# Altium PCB PCB.PcbDoc
Units mm, origin at the board's own origin, x right, y up, seen from the top; angles counter-clockwise.
Board outline 41 x 58.5 mm, 2 copper layers (Top Layer, Bottom Layer); 36 components, 22 nets, 142 pads, 28 vias.
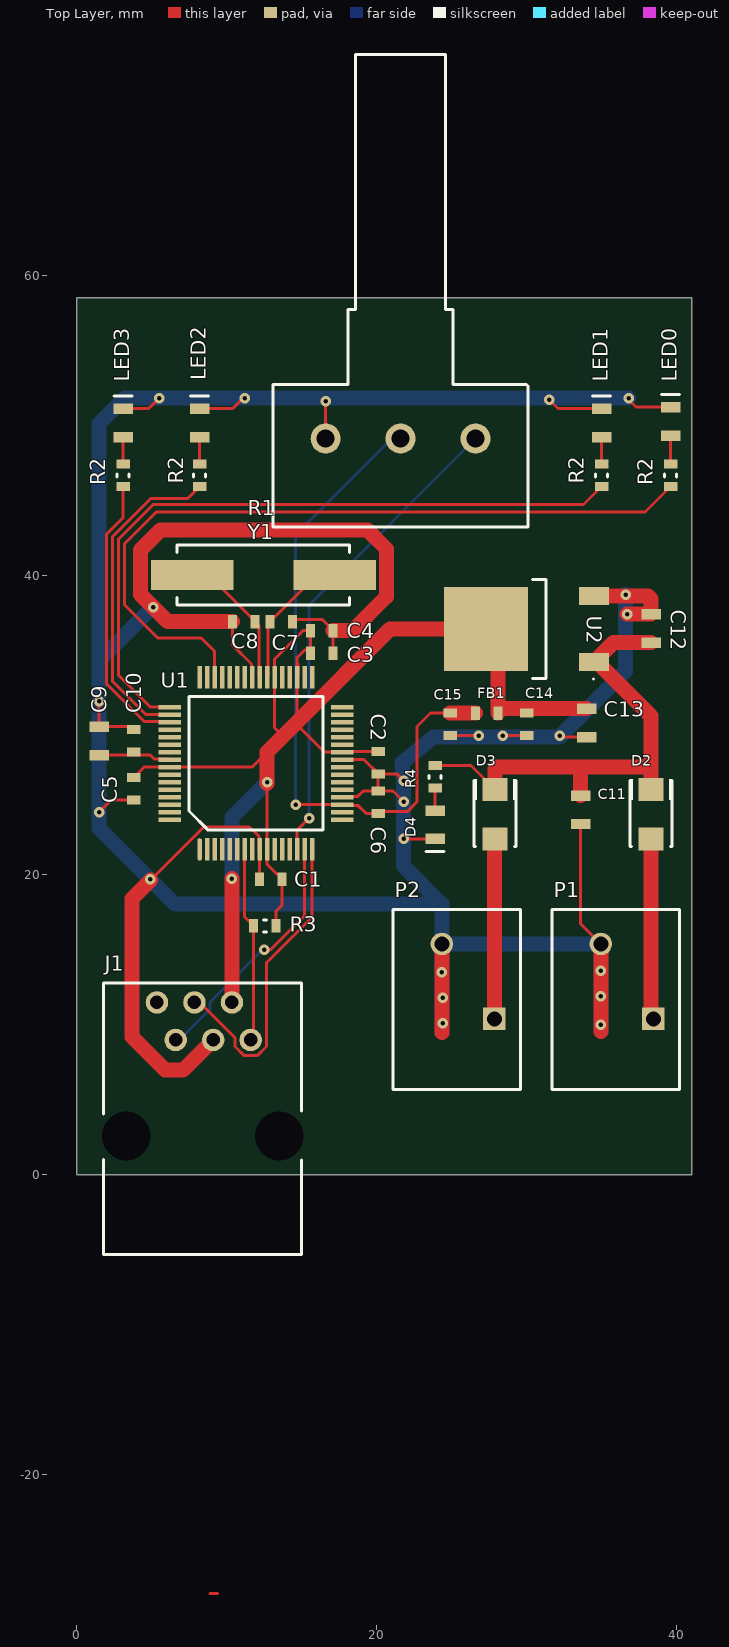
[diagram p0: Top Layer view]
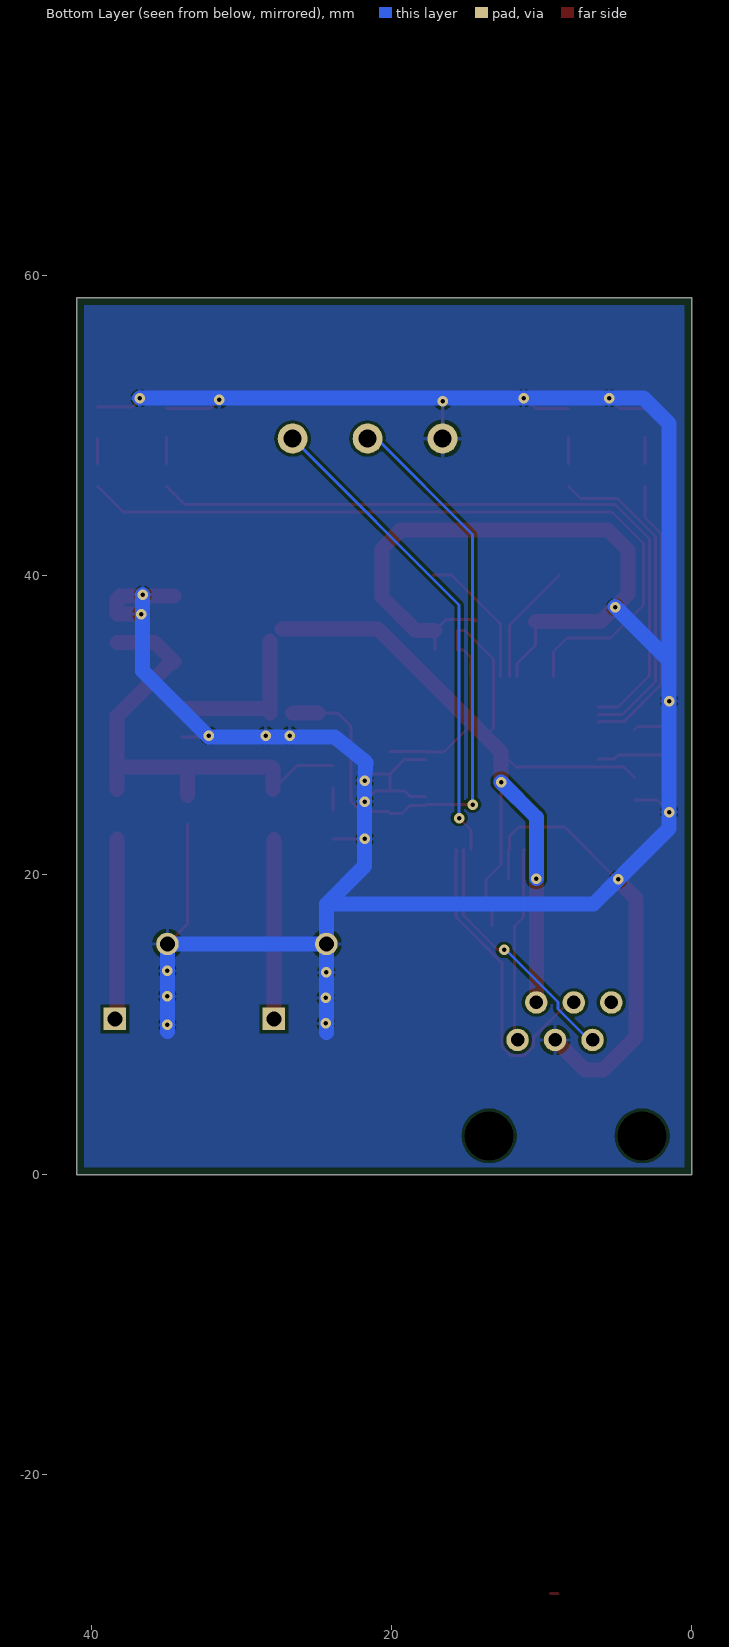
[diagram p1: Bottom Layer view, seen from below]

## Layer stack, top to bottom
Top Solder: solder mask 0.0102, Solder Resist, Dk 3.5
Top Layer: signal copper 0.0356
Dielectric 1: dielectric 0.32, FR-4, Dk 4.8
Bottom Layer: signal copper 0.0356
Bottom Solder: solder mask 0.0102, Solder Resist, Dk 3.5

## Board outline
0,0 0,58.5 41,58.5 41,0

## Design rules (kind name [scope] priority, off if disabled: settings)
Clearance [All] p1: gap=0.2
ComponentClearance [All] p1: gap=0.15 collisioncheckmode=3 verticalgap=0.15 showdistances=FALSE
HoleSize [All] p1: absolutevalues=TRUE maxlimit=5 minlimit=0.3 maxpercent=80.000 minpercent=20.000
MinimumSolderMaskSliver [All] p1: minsoldermaskwidth=0.05
PolygonConnect [All] p1: connectstyle=Relief reliefconductorwidth=0.254 reliefentries=4 polygonreliefangle="90 Angle" airgapwidth=0.254
RoutingVias [All] p1: holewidth=0.3 width=0.7 viastyle="Through Hole" minholewidth=0.3 minwidth=0.7 maxholewidth=1 maxwidth=1.2
SilkToBoardRegionClearance [Not InComponent('J1')  And  Not InComponent('R1')] p1:
SilkToSilkClearance [All] p1: silktosilkclearance=0.1
SilkToSolderMaskClearance [IsPad] p1: minsilkscreentomaskgap=0.2 clearancetoexposedcopper=TRUE
SolderMaskExpansion [All] p1: expansion=0.102
UnpouredPolygon [All] p1: allowunpoured=FALSE
Width [All] p1: maxlimit=1 minlimit=0.2 preferedwidth=0.2
23 further rules are at their usual default settings.

## Classes and differential pairs
channel class led: LED0 LED1 LED2 LED3
net class LED[0..3]: LED0 LED1 LED2 LED3
component class TP2: R1
component class POWER: C11 C12 C13 C14 C15 D2 D3 D4 FB1 P1 P2 R4 U2
component class PIC: C1 C2 C3 C4 C5 C6 C7 C8 C9 C10 J1 R3 U1 Y1
component class LED3: LED3 R2
component class LED2: LED2 R2
component class LED1: LED1 R2
component class LED0: LED0 R2

## Components (designator, comment, footprint, x,y, rotation, side; value= is the part's Value field where it differs from the comment)
C1 "100nF" CAPC1608N 12.2,19.7 r0 top
C2 "100nF" CAPC1608N 20.1,26.75 r90 top
C3 "100nF" CAPC1608N 17.1,34.8 r180 top
C4 "100nF" CAPC1608N 17.1,36.3 r180 top
C5 "100nF" CAPC1608N 3.8,25 r90 top
C6 "100nF" CAPC1608N 20.1,25.6 r270 top
C7 "20pF" CAPC1608N 14.4,36.9 r180 top
C8 "20pF" CAPC1608N 10.4,36.9 r0 top
C9 "10uF" CAPC2012N 1.5,29.9 r270 top
C10 "1uF" CAPC1608N 3.8,29.7 r270 top
C11 "10uF" CAPC2012N 33.6,23.4 r90 top
C12 "10uF" CAPC2012N 38.3,37.4 r270 top
C13 "10uF" CAPC2012N 34,29.2 r90 top
C14 "1uF" CAPC1608N 30,29.3 r90 top
C15 "100nF" CAPC1608N 24.9,29.3 r90 top
D2 "GF1A" SMA/DO-214AC_21 38.3,25.7 r270 top
D3 "GF1A" SMA/DO-214AC_21 27.9,25.7 r270 top
D4 "Green LED" "LED 0805" 23.9,22.4 r90 top
FB1 "600r" INDC1608AN 28.1,30.8 r180 top
J1 "Program / Debug" RJ12_90 1.8,-5.3 r0 top
LED0 "Green LED" "LED 0805" 39.6,51.2 r270 top (schematic designator LED3)
LED1 "Green LED" "LED 0805" 35,51.1 r270 top (schematic designator LED3)
LED2 "Green LED" "LED 0805" 8.2,51.1 r270 top (schematic designator LED3)
LED3 "Green LED" "LED 0805" 3.1,51.1 r270 top
P1 "12V Main" PHOENIX_1985195 31.7,5.7 r0 top
P2 "12V Battery" PHOENIX_1985195 21.1,5.7 r0 top
R1 "10k" PDB181-K415K-102A2 13.1,43.2 r0 top
R2 "330r" RESC1608N 3.1,45.9 r90 top
R2 "330r" RESC1608N 8.2,45.9 r90 top
R2 "330r" RESC1608N 35,45.9 r90 top
R2 "330r" RESC1608N 39.6,45.9 r90 top
R3 "4.7k" RESC1608N 13.3,16.6 r180 top
R4 "470r" RESC1608N 23.9,25.8 r90 top
U1 "PIC32MX764F128H-I/PT" QFP50P1200X1200X120-64 8.2,21.7 r90 top
U2 "AP1117" TD03B_N 27.3,36.4 r90 top
Y1 "8MHz" "HC49/4H SMX CRYSTAL" 7.7,40 r0 top

## Footprints (in the part's own frame and the unit in brackets; to place one, negate y for a bottom-side part, rotate by r counter-clockwise, add the part's x,y. Pads: shape width x height; smd on the part's side, far side on the other; paste and mask are expansions set on the pad)
CAPC1608N [mm] "0603"
  rect 0.6x0.9 smd mask+0.2: 1(0,0) 2(1.5,0)
CAPC2012N [mm] "0805"
  rect 0.7x1.3 smd mask+0.2: 1(0,0) 2(1.9,0)
"HC49/4H SMX CRYSTAL" [mm] "HC49/4HSMX"
  rect 5.5x2 smd mask+0.2: 1(0,0) 2(9.5,0)
  silkscreen extent -1,-2 10.5,2
INDC1608AN [mm] "0603"
  rect 0.6x0.9 smd mask+0.2: 1(0,0) 2(1.5,0)
"LED 0805" [mm] "0805"
  rect 0.7x1.3 smd mask+0.2: 1(1.9,0) 2(0,0)
  silkscreen extent -0.82,-0.6 -0.82,0.6
PDB181-K415K-102A2 [mm]
  round 2 hole 1.2 mask+0.2: 1(3.5,5.9) 2(8.5,5.9) 3(13.5,5.9)
  silkscreen extent 0,0 17,31.5
PHOENIX_1985195 [mm]
  rect 1.5x1.5 hole 1 mask+0.2: 1(6.75,4.7)
  round 1.5 hole 1 mask+0.2: 2(3.25,9.7)
  silkscreen extent 0,0 8.5,12
QFP50P1200X1200X120-64 [mm]
  oval 1.5x0.3 smd mask+0.2: 1(0,0)
  rect 1.5x0.3 smd mask+0.2: 2(0,-0.5) 3(0,-1) 4(0,-1.5) 5(0,-2) 6(0,-2.5) 7(0,-3) 8(0,-3.5) 9(0,-4) 10(0,-4.5) 11(0,-5) 12(0,-5.5) 13(0,-6) 14(0,-6.5) 15(0,-7) 16(0,-7.5) 33(11.5,-7.5) 34(11.5,-7) 35(11.5,-6.5) 36(11.5,-6) 37(11.5,-5.5) 38(11.5,-5) 39(11.5,-4.5) 40(11.5,-4) 41(11.5,-3.5) 42(11.5,-3) 43(11.5,-2.5) 44(11.5,-2) 45(11.5,-1.5) 46(11.5,-1) 47(11.5,-0.5) 48(11.5,0)
  rect 0.3x1.5 smd mask+0.2: 17(2,-9.5) 18(2.5,-9.5) 19(3,-9.5) 20(3.5,-9.5) 21(4,-9.5) 22(4.5,-9.5) 23(5,-9.5) 24(5.5,-9.5) 25(6,-9.5) 26(6.5,-9.5) 27(7,-9.5) 28(7.5,-9.5) 29(8,-9.5) 30(8.5,-9.5) 31(9,-9.5) 32(9.5,-9.5) 49(9.5,2) 50(9,2) 51(8.5,2) 52(8,2) 53(7.5,2) 54(7,2) 55(6.5,2) 56(6,2) 57(5.5,2) 58(5,2) 59(4.5,2) 60(4,2) 61(3.5,2) 62(3,2) 63(2.5,2) 64(2,2)
  silkscreen extent 1.28,-8.21 10.21,0.72
RESC1608N [mm] "0603"
  rect 0.6x0.9 smd mask+0.2: 1(0,0) 2(1.5,0)
  silkscreen extent 0.65,-0.4 0.85,0.4
RJ12_90 [mm]
  round 1.5 hole 0.9 mask+0.2: 1(9.8,14.3) 2(8.55,16.8) 3(7.3,14.3) 4(6.05,16.8) 5(4.8,14.3) 6(3.55,16.8)
  oval 0.75x0.7 hole 3.25 unplated mask+0.2: 13(1.5,7.9) 13(11.7,7.9)
  silkscreen extent 0,0 13.2,18.1
SMA/DO-214AC_21 [mm]
  rect 1.52x1.68 smd mask+0.2: 1(3.3,0) 2(0,0)
  silkscreen extent -0.7,-1.4 3.8,1.4
TD03B_N [mm]
  rect 1.2x2 smd mask+0.2: 1(2.2,-7.2) 3(-2.2,-7.2)
  rect 5.6x5.6 smd mask+0.2: 4(0,0)
  silkscreen extent -3.32,-7.17 3.3,-3.1

## Part data
C1 C2 C3 C4 C5 C6 C7 C8 C9 C10 C11 C12 C13 C14 C15: library part Cap, "Capacitor"
D2 D3: library part Diode, "Default Diode"
D4 LED0 LED1 LED2 LED3: library part LED2, "Typical RED, GREEN, YELLOW, AMBER GaAs LED"
FB1: library part Inductor, "Inductor"
P1 P2: library part "Header 2", "Header, 2-Pin"
R1: library part RPot, "Potentiometer"
R2 R2 R2 R2 R3 R4: library part Res1, "Resistor"
Y1: library part XTAL, "Crystal Oscillator"

## Via types
v1: diameter 0.7, hole 0.3, Top Layer to Bottom Layer, 28 vias

## Nets (pads, with @x,y where several pads share a name; then routed paths per layer and width w, separated by ;. In a path a pad name is that pad's centre, name@x,y a point inside that pad or via, vN(x,y) a via of type N, cw(c..) or ccw(c..) an arc to the next point about the centre after c; other vN are vias at no path point)
ALIM: D2.1 P1.1 | length 11.8
  Top Layer w1: P1.1@38.3,10.55 D2.1
BATTERY: D3.1 P2.1 | length 11.9
  Top Layer w1: P2.1 D3.1@27.85,22.35
GND: C1.1 C2.1 C3.1 C4.1 C5.1 C6.1 C7.1 C8.1 C9.1 C10.1 C11.1 C12.1 C13.1 C14.1 C15.1 D4.2 J1.3 LED0.2 LED1.2 LED2.2 LED3.2 P1.2 P2.2 R1.1 U1.9 U1.20 U1.25 U1.41 U2.1 | length 291.3
  Top Layer w0.2: v1(1.5,24.2) 2.3,25 C5.1 ; v1@1.5,31.7 C9.1 3.6,29.9 C10.1 ; LED3.2 4.8,51.1 v1(5.5,51.8) ; v1@4.932,19.668 8.464,23.2 11.524,23.2 12.15,22.574 12.15,21.65 U1.9 C1.1 ; LED2.2 10.4,51.1 v1@11.1,51.8 ; C8.1 10.4,35.324 11.65,34.074 U1.41@11.65,33.25 ; C7.1 14.4,37.05 16.35,37.05 C4.1 C3.1@17.1,35 ; R1.1 v1(16.6,51.6) ; U1.25 19.15,27.7 C2.1 ; U1.20@17.75,25.25 18.75,25.25 19.1,25.6 C6.1 ; v1(21.8,24.9) 21.1,25.6 C6.1 ; v1(21.8,26.3) 21.35,26.75 C2.1 ; v1@21.9,22.5 v1(21.8,22.4) D4.2 ; C15.1@24.726,29.3 C15.1 v1(26.8,29.3) ; v1(28.4,29.3) C14.1 ; v1(31.5,51.7) 32.1,51.1 LED1.2 ; v1@32.3,29.2 C13.1 ; C11.1 33.6,16.75 P1.2 ; v1@36.8,51.7 37.3,51.2 LED0.2 ; C6.1 C2.1
  Top Layer w1: v1@4.932,19.668 3.7,18.436 3.7,9.2 5.9,7 7.1,7 J1.3 ; C8.1 6.06,36.9 4.25,38.71 4.25,41.67 5.58,43 19.4,43 20.65,41.75 20.65,38.55 18.4,36.3 C4.1 ; 24.35,9.5 P2.2 ; U2.1 38.1,38.6 38.3,38.4 C12.1 v1(36.7,37.4) ; 34.95,9.55 P1.2
  Bottom Layer w1: v1@5.1,37.9 1.5,34.3 ; 24.35,9.5 P2.2 ; 34.95,9.55 P1.2 P2.2 ; v1(36.6,38.7) 36.6,33.6 32.2,29.2 23.8,29.2 21.7,27.5 v1(21.8,26.3) v1(21.8,24.9) 21.8,20.6 24.35,18.05 ; v1(36.8,51.8) v1(11.2,51.8) v1(5.5,51.8) 3.2,51.8 1.5,50.1 1.5,34.3 ; 1.5,34.3 v1(1.5,31.6) v1(1.5,24.2) 1.5,23.1 v1(4.9,19.7) 6.55,18.05 24.35,18.05 ; P2.2 24.35,18.05
  other v1: 34.95,10 24.4,10.1 24.4,11.8 34.95,11.9 24.35,13.5 34.95,13.6 32.2,29.3 5.1,37.86
LED0: R2.1@39.6,45.9 U1.46 | length 51.1
  Top Layer w0.2: U1.46 9.2,34.9 8.3,35.8 5.4,35.8 3.2,38 3.2,42.1 5.3,44.2 37.9,44.2 R2.1@39.6,45.9
LED1: R2.1@35,45.9 U1.49 | length 47
  Top Layer w0.2: U1.49 4.9,31.2 2.8,33.3 2.8,42.4 5.1,44.7 33.8,44.7 R2.1@35,45.9
LED2: R2.1@8.2,45.9 U1.50 | length 21.6
  Top Layer w0.2: U1.50 4.6,30.7 2.4,32.9 2.4,42.566 4.934,45.1 7.4,45.1 R2.1@8.2,45.9
LED3: R2.1@3.1,45.9 U1.51 | length 18.9
  Top Layer w0.2: R2.1@3.1,45.9 3.1,43.831 2,42.731 2,32.734 4.484,30.25 6.15,30.25 U1.51
MCLR: J1.1 R3.2 U1.7 | length 12.8
  Top Layer w0.2: U1.7@11.15,21.65 U1.7 11.2,17.2 R3.2 J1.1@11.8,9.2
NetC9_2: C9.2 C10.2 U1.56 | length 4.8
  Top Layer w0.2: C9.2 4.9,28 5.15,27.75 6.15,27.75 U1.56
NetD4_1: D4.1 R4.1 | length 1.5
  Top Layer w0.2: D4.1 R4.1
NetLED3_LED0_1: LED0.1 R2.2@39.6,47.4 | length 1.7
  Top Layer w0.2: R2.2@39.6,47.4 LED0.1@39.6,49.1
NetLED3_LED1_1: LED1.1 R2.2@35,47.4 | length 1.8
  Top Layer w0.2: R2.2@35,47.4 LED1.1
NetLED3_LED2_1: LED2.1 R2.2@8.2,47.4 | length 1.8
  Top Layer w0.2: R2.2@8.2,47.4 LED2.1
NetLED3_LED3_1: LED3.1 R2.2@3.1,47.4 | length 1.8
  Top Layer w0.2: R2.2@3.1,47.4 LED3.1
NetR1_3: R1.3 U1.14 | length 32.2
  Top Layer w0.2: U1.14 14.7,23 v1@15.4,23.7
  Bottom Layer w0.2: v1(15.5,23.8) 15.5,38 R1.3
PGC: J1.5 U1.15 | length 16.5
  Top Layer w0.2: v1(12.5,15) 12.9,15 15.2,17.3 U1.15
  Bottom Layer w0.2: J1.5@6.835,9 8.9,11.065 8.9,11.535 12.365,15 v1(12.5,15)
PGD: J1.4 U1.16 | length 21
  Top Layer w0.2: J1.4@8.2,11.5 10.55,9.15 10.55,8.565 11.165,7.95 12.035,7.95 12.65,8.565 12.65,14.15 15.7,17.2 U1.16 U1.16@15.65,21.65
V3P3: C1.2 C2.2 C3.2 C4.2 C5.2 C13.2 C14.2 FB1.1 J1.2 R3.1 U1.10 U1.26 U1.35 U1.38 U1.57 U2.4 | length 88.2
  Top Layer w0.2: C5.2 4.5,27.2 U1.57 11.7,27.2 12.7,28.2 ; v1@12.7,26.1 U1.10 12.7,20.7 C1.2 13.7,18 13.3,17.6 R3.1 ; 13.75,29.25 13.2,29.8 U1.38 13.2,34.4 15.1,36.3 C4.2 15.6,35 15.2,35 14.7,34.5 U1.35 14.7,30.2 ; 14.6,30.1 16.5,28.2 U1.26 ; U1.35@14.75,33.25 14.75,34.074 ; U1.26@17.75,28.25 C2.2
  Top Layer w1: J1.2 v1(10.35,19.75) ; v1@12.7,26.1 v1(12.7,26.2) 12.7,28.2 13.75,29.25 14.6,30.1 14.7,30.2 20.9,36.4 U2.4 ; FB1.1 U2.4@28.1,35.6 ; 28.4,31.1 C13.2
  Bottom Layer w1: v1(10.35,19.75) 10.35,23.85 v1(12.7,26.2)
V3P3A: C6.2 C15.2 FB1.2 R1.2 U1.19 | length 44.9
  Top Layer w0.2: v1(14.6,24.7) U1.19 ; U1.19@17.75,24.65 18.75,24.65 19.3,24.1 C6.2 20.25,24.25 22.069,24.25 22.7,24.881 22.7,29.9 23.6,30.8 C15.2
  Top Layer w1: C15.2 FB1.2
  Bottom Layer w0.2: v1(14.6,24.7) 14.6,42.7 R1.2@21,49.1
V5: C11.2 C12.2 D2.2 D3.2 R4.2 U2.3 | length 32.7
  Top Layer w0.2: R4.2 26.3,27.3 D3.2
  Top Layer w1: D3.2 27.9,27.1 28,27.2 33.6,27.2 ; C11.2 33.6,27.2 ; U2.3 35.8,35.5 C12.2 ; U2.3@34.7,34.2 38.3,30.6 38.3,27.2 ; D2.2 38.3,27.2 ; 33.6,27.2 38.3,27.2
X1: C7.2 U1.39 Y1.2 | length 9.4
  Top Layer w0.2: U1.39 12.75,33.25 12.75,36.75 C7.2 16,40 Y1.2
X2: C8.2 U1.40 Y1.1 | length 8.1
  Top Layer w0.2: Y1.1@8.8,40 C8.2 12.15,36.65 U1.40@12.15,33.25
pads on no net: J1.6 J1.13 U1.1 U1.2 U1.3 U1.4 U1.5 U1.6 U1.8 U1.11 U1.12 U1.13 U1.17 U1.18 U1.21 U1.22 U1.23 U1.24 U1.27 U1.28 U1.29 U1.30 U1.31 U1.32 U1.33 U1.34 U1.36 U1.37 U1.42 U1.43 U1.44 U1.45 U1.47 U1.48 U1.52 U1.53 U1.54 U1.55 U1.58 U1.59 U1.60 U1.61 U1.62 U1.63 U1.64
copper on no net: | length 0.5
  Top Layer w0.2: 8.9,-27.9 9.4,-27.9

## Polygon pours and split planes (outlines as drawn)
GND on Bottom Layer "Bottom Layer-No Net" (solid, remove dead copper, pour order 3): 40.5,0.5 40.5,58 0.5,58 0.5,0.5

## Silkscreen, mask and mechanical layers (free items; w line width, h text height)
Drill Drawing:
  circle w0.025: c49.265,9.398 r0.635
  lines w0.025: 48.63,4.953 49.9,4.953 49.9,6.223 48.63,6.223 48.63,4.953 ; 48.63,13.843 49.9,13.843 49.265,12.573 48.63,13.843 ; 48.63,16.7 48.948,16.7 49.265,16.383 49.583,16.7 49.9,16.7 49.583,17.018 49.9,17.335 49.583,17.335 49.265,17.653 48.948,17.335 48.63,17.335 48.948,17.018 48.63,16.7 ; 48.63,20.193 49.265,20.511 49.9,20.193 49.583,20.828 49.9,21.463 49.265,21.145 48.63,21.463 48.948,20.828 48.63,20.193
  lines w0.381: 46.9,3.81 145.426,3.81 ; 46.9,22.86 145.426,22.86 ; 60.892,0 60.892,26.67 ; 78.617,0 78.617,26.67 ; 112.795,0 112.795,26.67 ; 125.644,0 125.644,26.67 ; 46.9,0 145.426,0 145.426,26.67 46.9,26.67 46.9,0
  text "Symbol" at 49.186,24.003 h1.83
  text "Hit Count" at 62.035,24.003 h1.83
  text "Finished Hole Size" at 79.76,24.003 h1.83
  text "Plated" at 113.938,24.003 h1.83
  text "Hole Type" at 126.787,24.003 h1.83
  text "2" at 62.035,20.193 h1.52
  text "3.250mm (127.95mil)" at 79.76,20.193 h1.52
  text "NPTH" at 113.938,20.193 h1.52
  text "Round" at 126.787,20.193 h1.52
  text "3" at 62.035,16.383 h1.52
  text "1.200mm (47.24mil)" at 79.76,16.383 h1.52
  text "PTH" at 113.938,16.383 h1.52
  text "Round" at 126.787,16.383 h1.52
  text "4" at 62.035,12.573 h1.52
  text "1.000mm (39.37mil)" at 79.76,12.573 h1.52
  text "PTH" at 113.938,12.573 h1.52
  text "Round" at 126.787,12.573 h1.52
  text "6" at 62.035,8.763 h1.52
  text "0.900mm (35.43mil)" at 79.76,8.763 h1.52
  text "PTH" at 113.938,8.763 h1.52
  text "Round" at 126.787,8.763 h1.52
  text "28" at 62.035,4.953 h1.52
  text "0.300mm (11.81mil)" at 79.76,4.953 h1.52
  text "PTH" at 113.938,4.953 h1.52
  text "Round" at 126.787,4.953 h1.52
  text "43 Total" at 62.035,1.143 h1.52
Board Outline:
  lines w0.2: 0,0 41,0 41,48.5 0,48.5 0,0

## Dimensions
0,0 to 0,58.5 on Drill Drawing
0,0 to 41,0 on Drill Drawing